# Altium PCB Radar_1GHz.PcbDoc (part 1 of 2)
Units mil, origin at the board's own origin, x right, y up, seen from the top; angles counter-clockwise.
Board outline 4921.26 x 3149.61 mil, 4 copper layers (Top Layer - RF, Layer 1 - GND, Layer 2 - GND, Bottom Layer - PWR), stack 62.633 mil thick; 158 components, 76 nets, 413 pads, 246 vias.
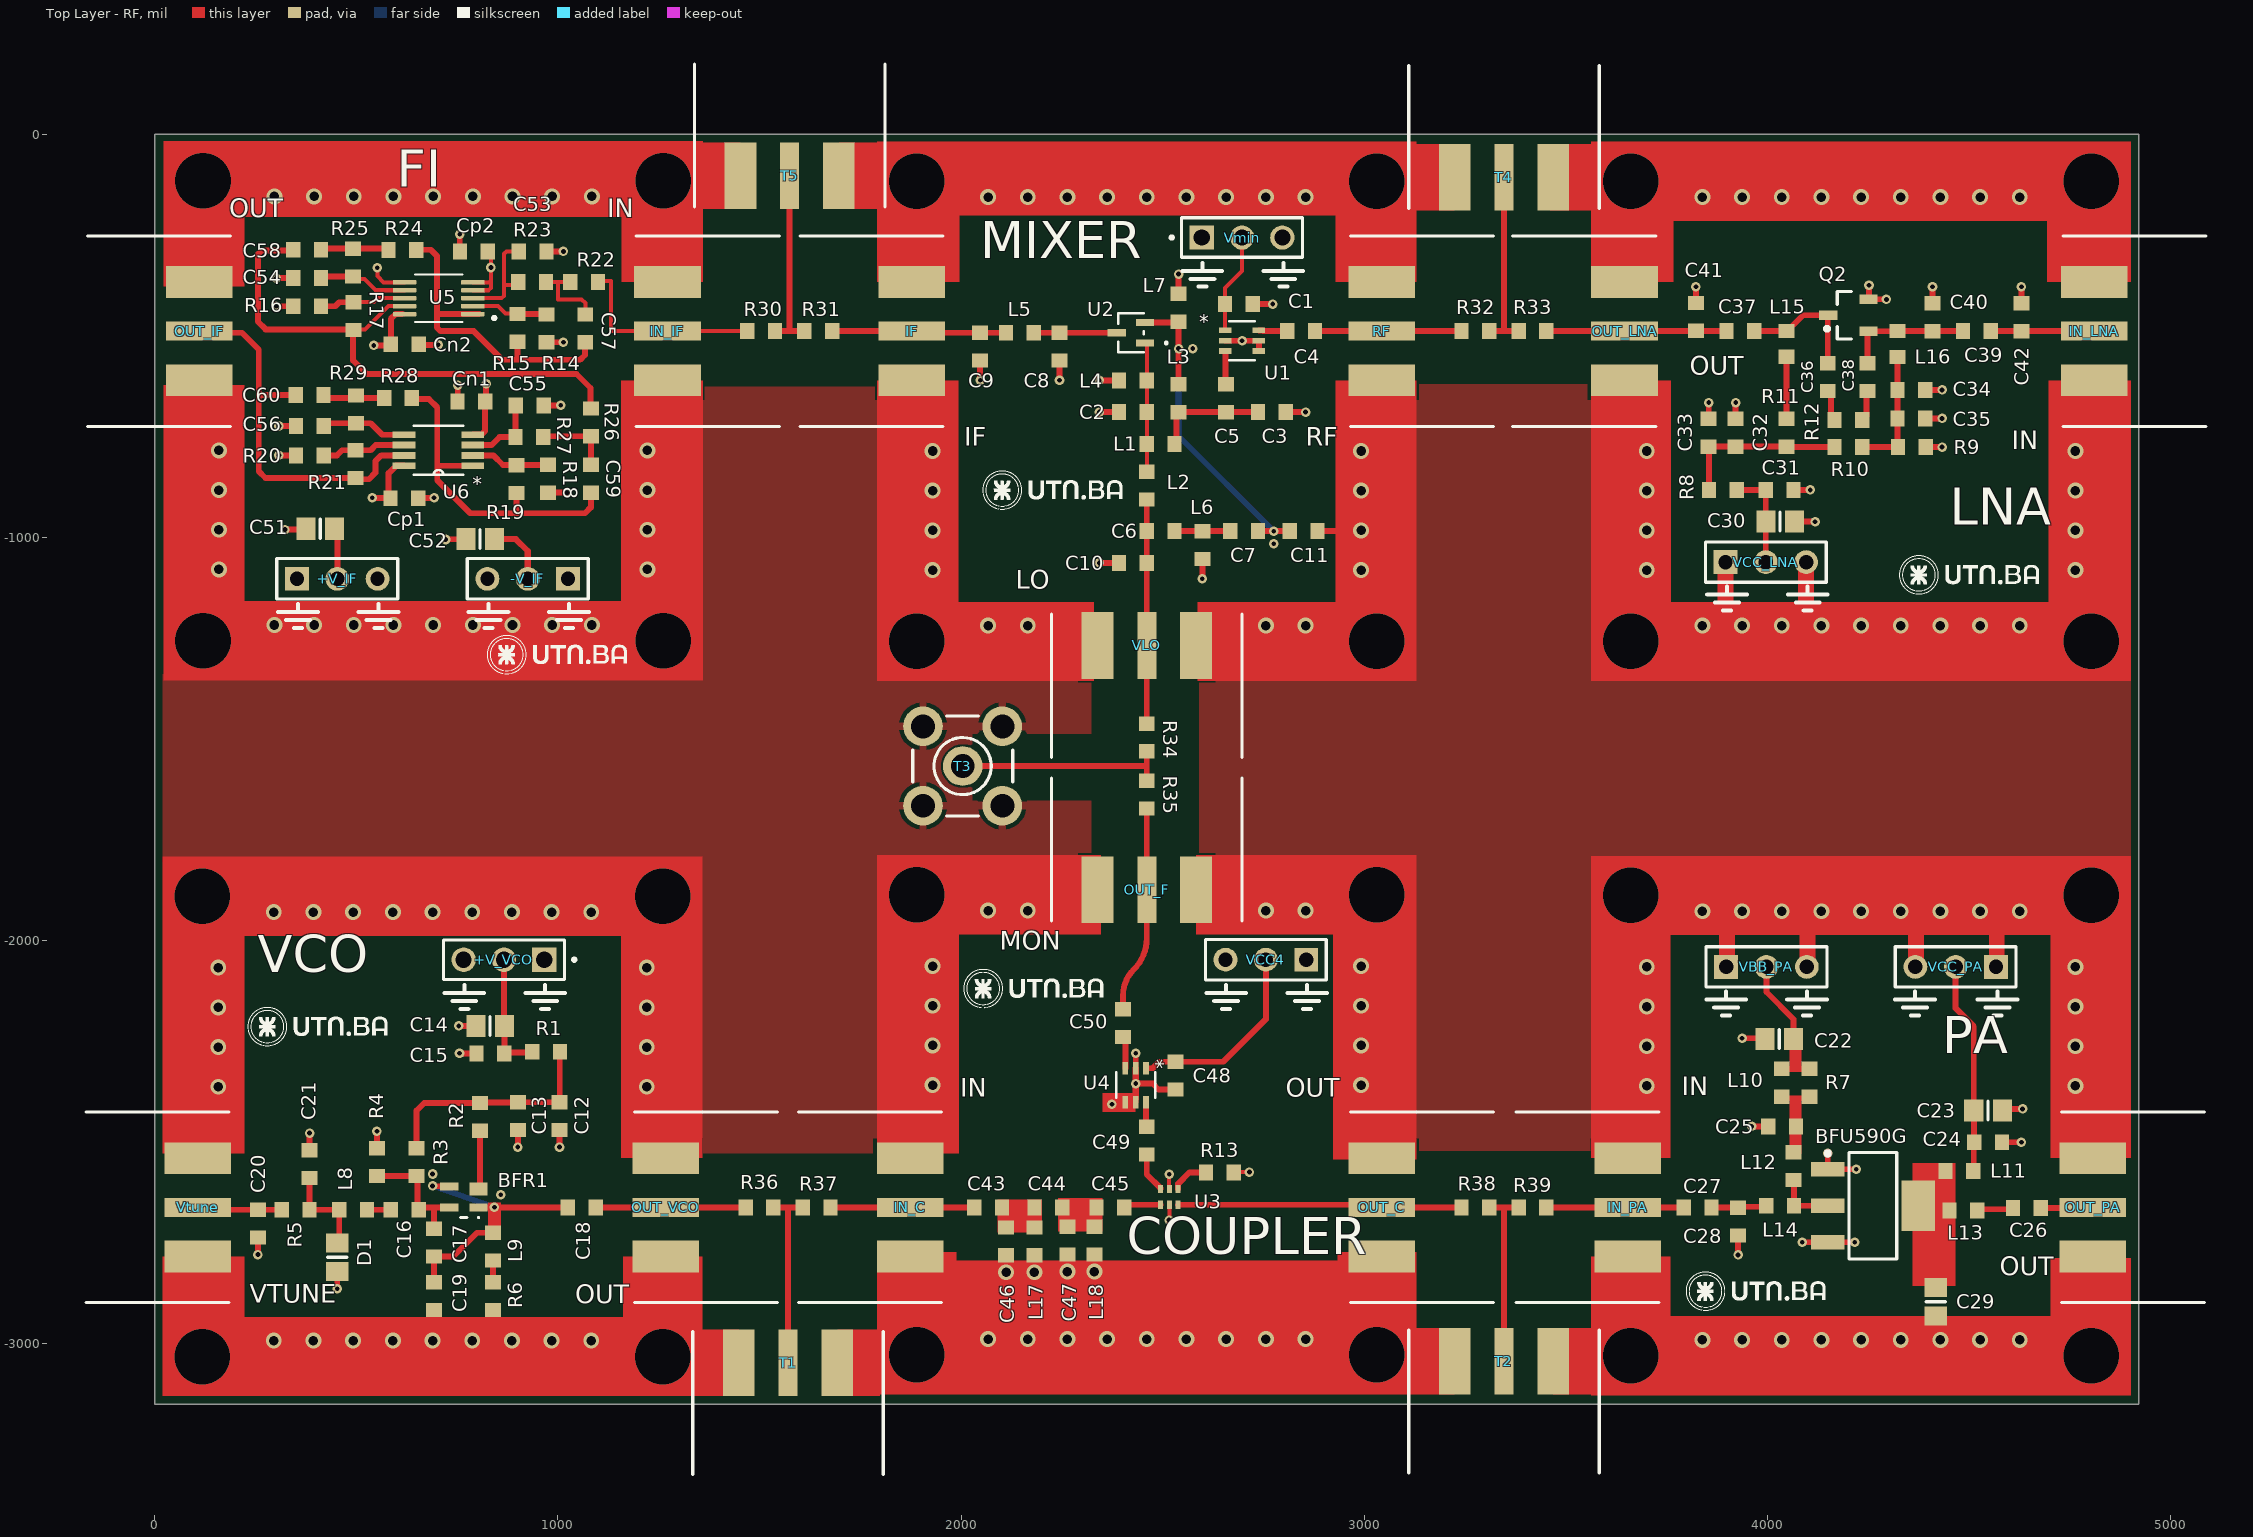
[diagram p0: Top Layer - RF view]
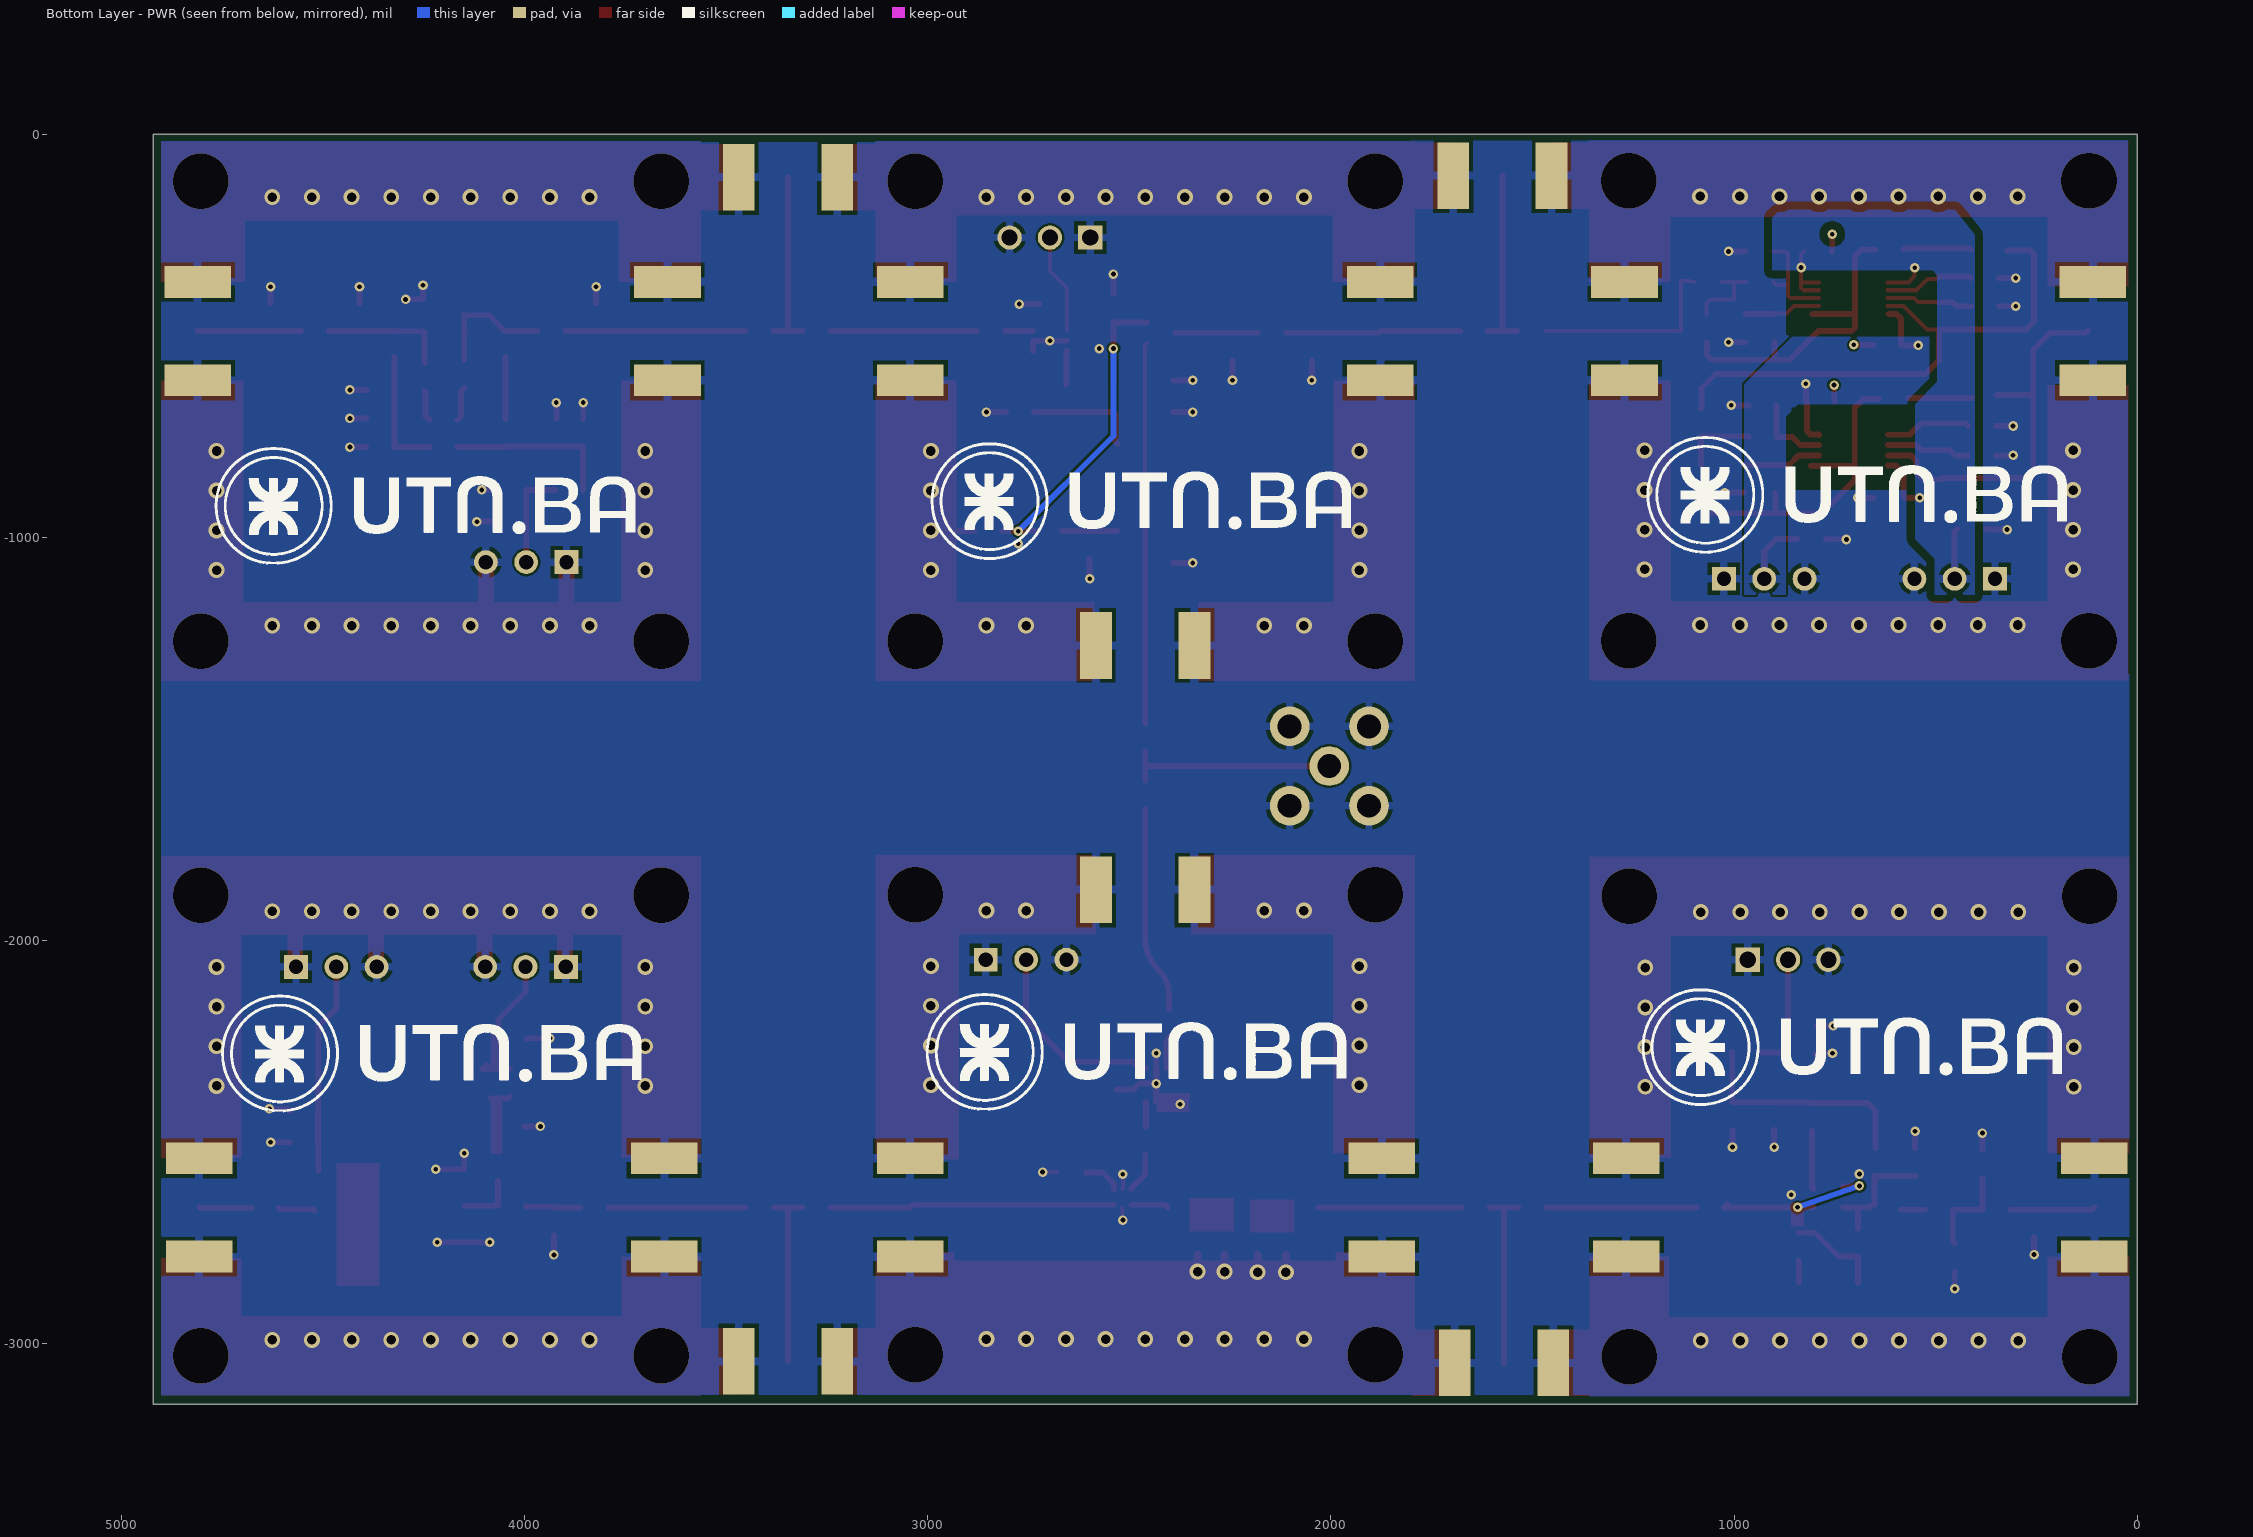
[diagram p1: Bottom Layer - PWR view, seen from below]
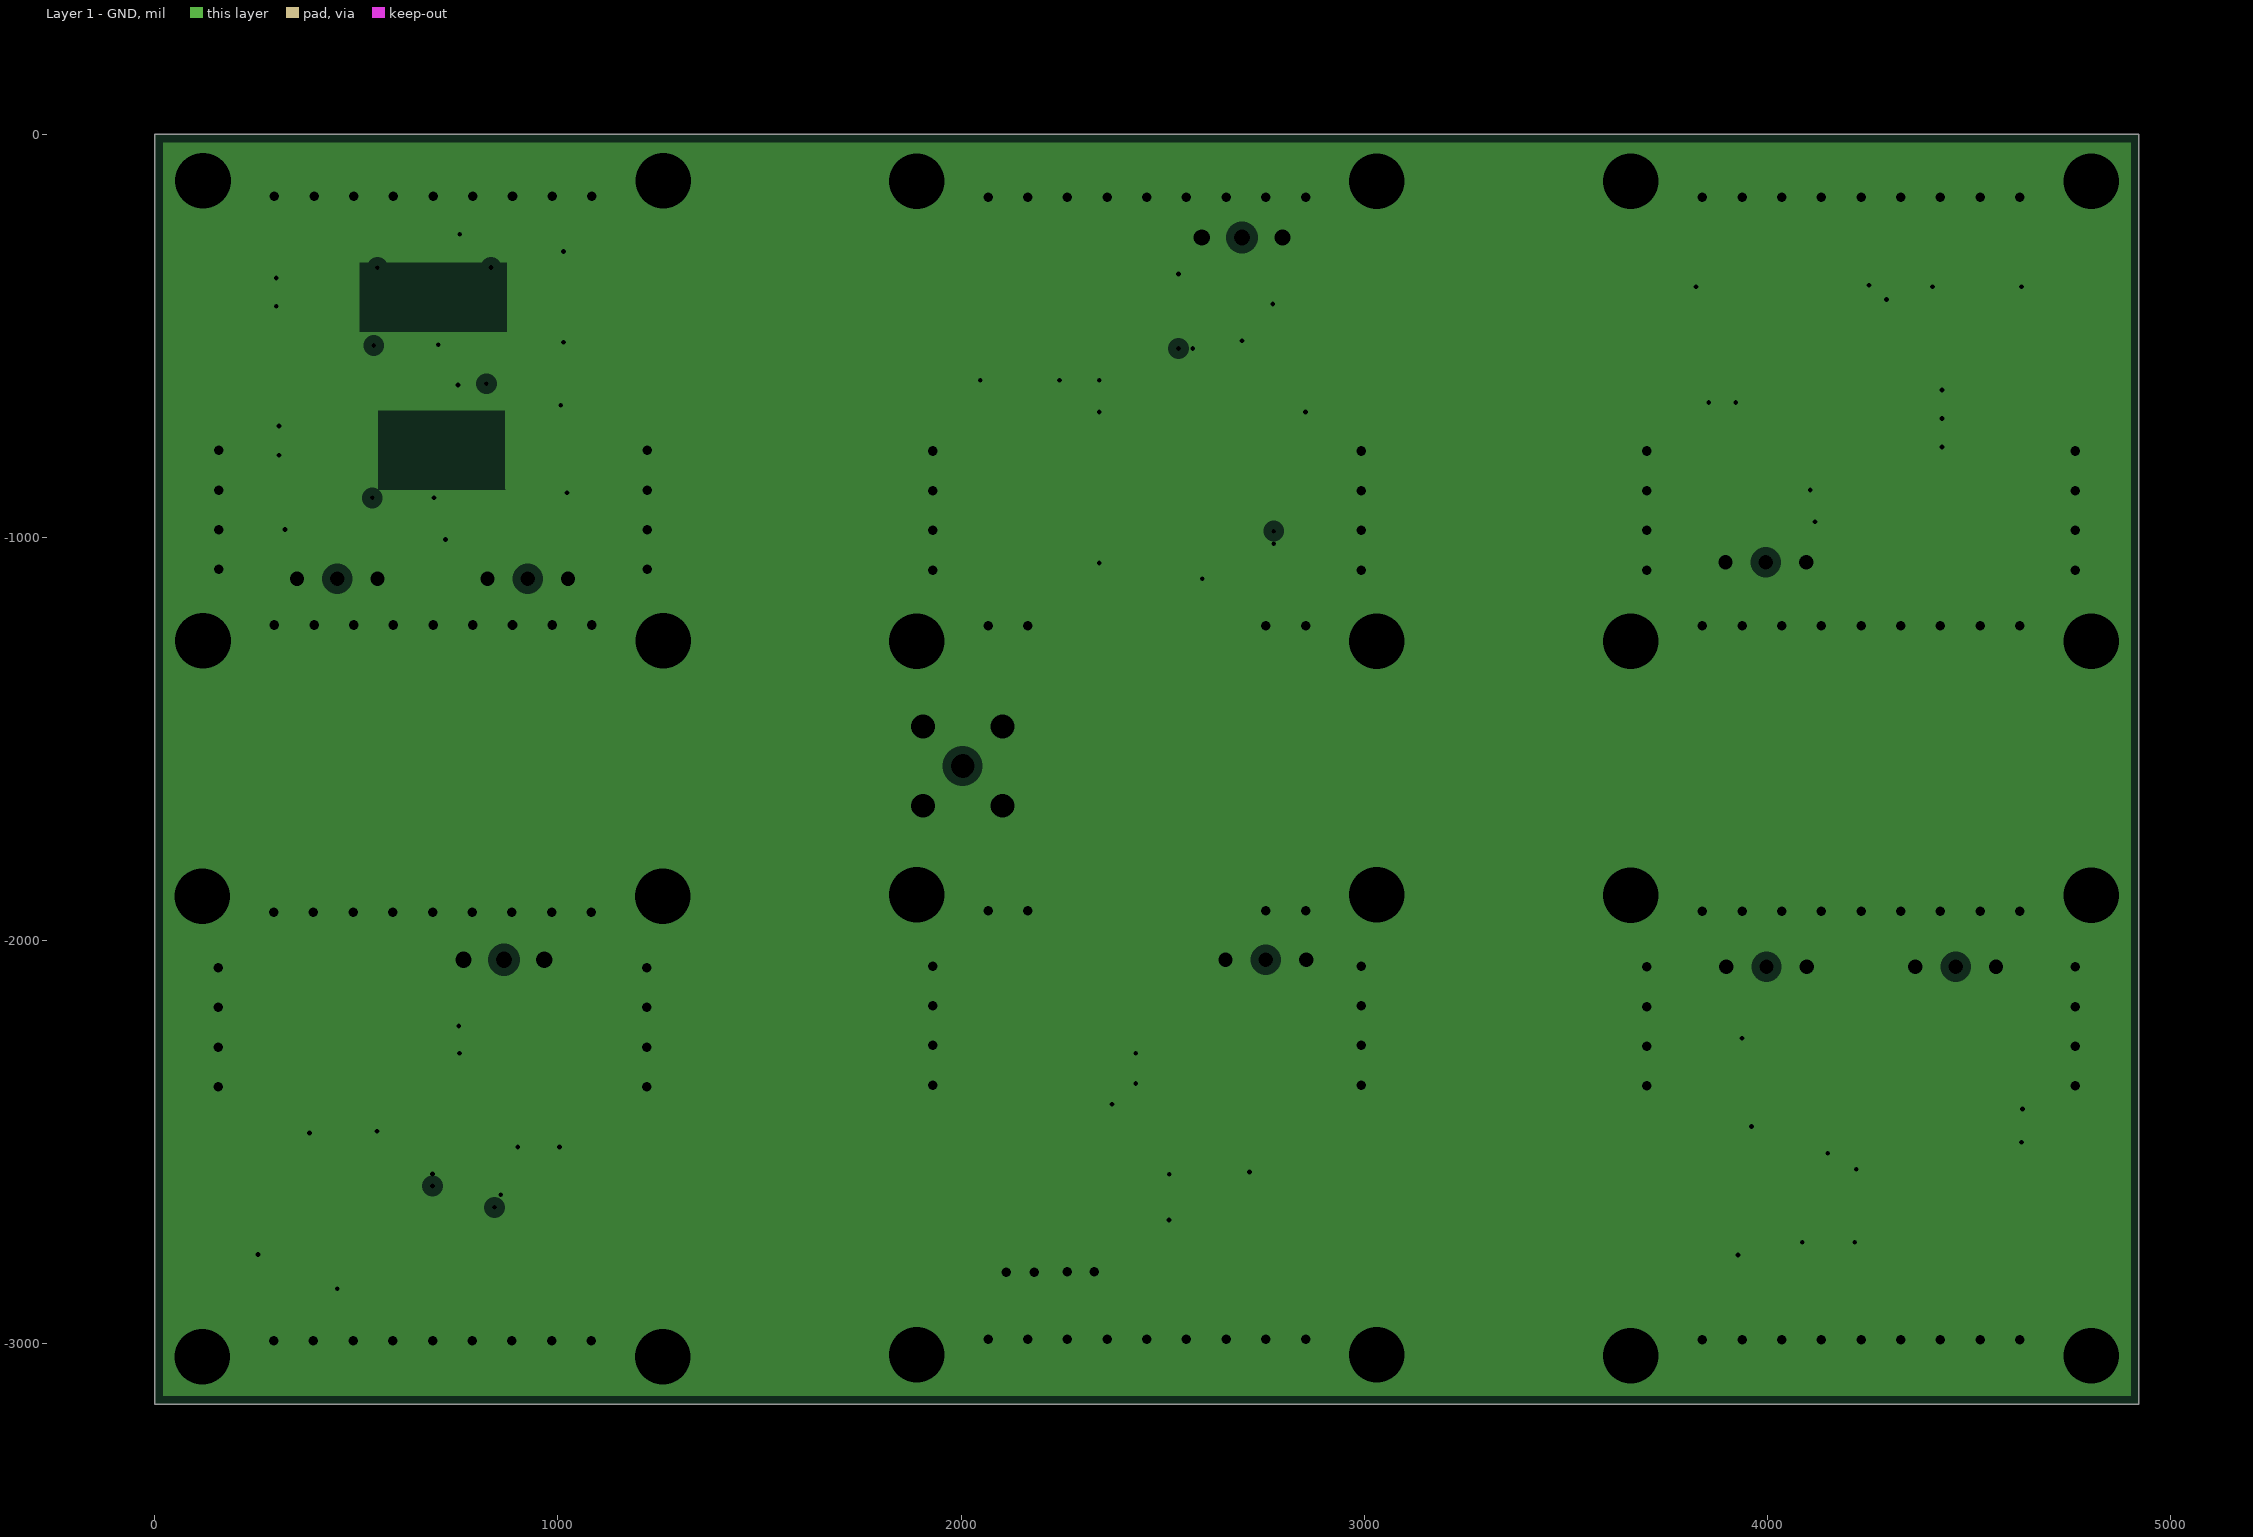
[diagram p2: Layer 1 - GND, clearances drawn from the general rule]
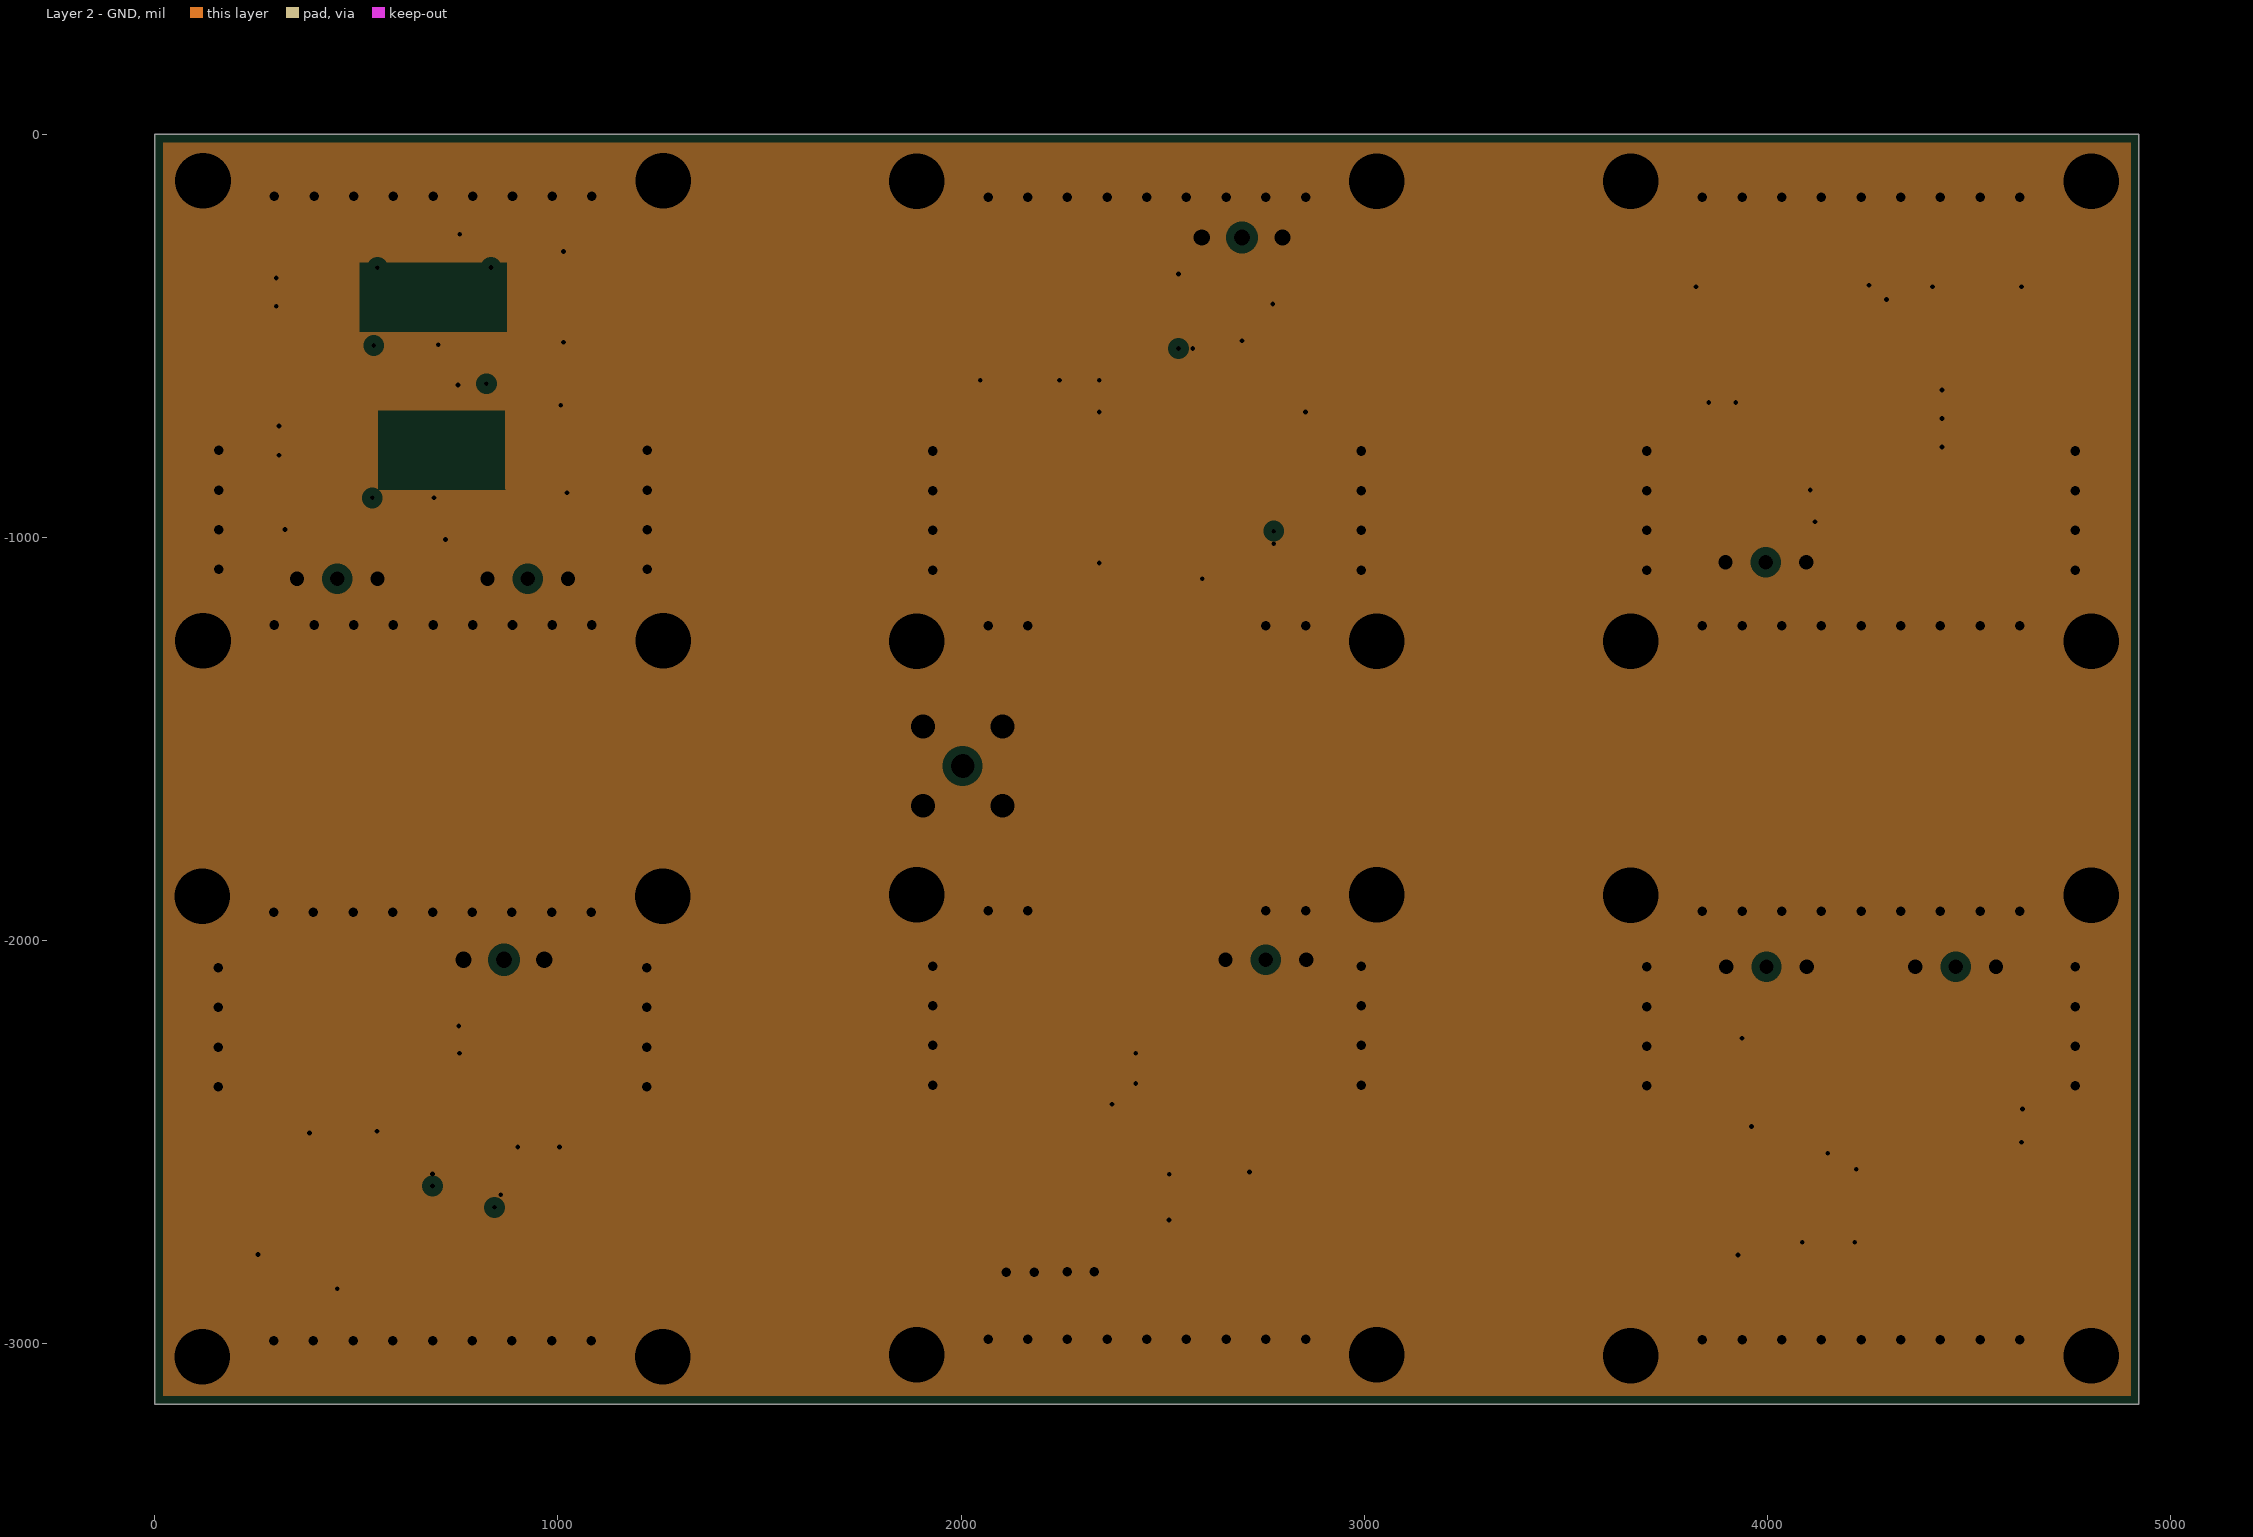
[diagram p3: Layer 2 - GND, clearances drawn from the general rule]

## Layer stack, top to bottom
Top Solder: solder mask 1, SM-001, Dk 4
Top Layer - RF: signal copper 1.378
Prepeg 1: prepreg 8.285, PP-006, Dk 4.4
Layer 1 - GND: plane copper 0.689, net GND
Dielectric 1: core 41.929, FR4, Dk 4.6
Layer 2 - GND: plane copper 0.689, net GND
Prepeg 2: prepreg 8.285, PP-006, Dk 4.4
Bottom Layer - PWR: signal copper 1.378
Bottom Solder: solder mask 1, SM-001, Dk 4

## Board outline
0,-3149.61 4921.26,-3149.61 4921.26,0 0,0

## Design rules (kind name [scope] priority, off if disabled: settings)
Clearance poly_top [InNamedPolygon('V+_sallen')] p1: gap=19.68 ignorepadtopadclearanceinfootprint=FALSE except(0: Arc-Hole Track-Hole SMDPad-Hole THPad-Hole Via-Hole Fill-Hole Poly-Hole Region-Hole Text-Hole)
Clearance poly_fi [InNamedPolygon('GND_L02_P006')] p2: gap=19.68 ignorepadtopadclearanceinfootprint=FALSE except(0: Arc-Hole Track-Hole SMDPad-Hole THPad-Hole Via-Hole Fill-Hole Poly-Hole Region-Hole Text-Hole)
Clearance poly_dc [InNamedPolygon('GND_L02_P005')] p3: gap=19.68 ignorepadtopadclearanceinfootprint=FALSE except(0: Arc-Hole Track-Hole SMDPad-Hole THPad-Hole Via-Hole Fill-Hole Poly-Hole Region-Hole Text-Hole)
Clearance poly_lna [InNamedPolygon('GND_L02_P004')] p4: gap=19.68 ignorepadtopadclearanceinfootprint=FALSE except(0: Arc-Hole Track-Hole SMDPad-Hole THPad-Hole Via-Hole Fill-Hole Poly-Hole Region-Hole Text-Hole)
Clearance poly_pa [InNamedPolygon('GND_L02_P003')] p5: gap=19.68 ignorepadtopadclearanceinfootprint=FALSE except(0: Arc-Hole Track-Hole SMDPad-Hole THPad-Hole Via-Hole Fill-Hole Poly-Hole Region-Hole Text-Hole)
Clearance poly_vco [InNamedPolygon('GND_L02_P001')] p6: gap=19.68 ignorepadtopadclearanceinfootprint=FALSE except(0: Arc-Hole Track-Hole SMDPad-Hole THPad-Hole Via-Hole Fill-Hole Poly-Hole Region-Hole Text-Hole)
Clearance poly_0 [InNamedPolygon('GND_L02_P000')] p7: gap=19.68 ignorepadtopadclearanceinfootprint=FALSE except(0: Arc-Hole Track-Hole SMDPad-Hole THPad-Hole Via-Hole Fill-Hole Poly-Hole Region-Hole Text-Hole)
Clearance [All] p8: gap=5 ignorepadtopadclearanceinfootprint=FALSE except(0: Arc-Hole Track-Hole SMDPad-Hole THPad-Hole Via-Hole Fill-Hole Poly-Hole Region-Hole Text-Hole)
ComponentClearance [All] p1: gap=0.39 collisioncheckmode=3 verticalgap=100000 showdistances=TRUE donotcheckwithout3dbody=TRUE
HoleSize [All] p1: absolutevalues=TRUE maxlimit=196.85 minlimit=1 maxpercent=80.000 minpercent=20.000
MinimumSolderMaskSliver [All] p1: minsoldermaskwidth=0.39
PlaneClearance plane_clearance_vias [IsVia] p1: clearance=6
PlaneClearance [All] p2: clearance=20
PlaneConnect PlaneConnect_vias [IsVia] p1: planeconnectstyle=Direct reliefexpansion=20 reliefentries=4 reliefconductorwidth=10 reliefairgap=10
PlaneConnect [All] p2: planeconnectstyle=Relief reliefexpansion=20 reliefentries=4 reliefconductorwidth=10 reliefairgap=10
PolygonConnect PolygonConnect_via [IsVia vs IsPolygon] p1: connectstyle=Direct reliefconductorwidth=10 reliefentries=4 polygonreliefangle="90 Angle" airgapwidth=10
PolygonConnect [All] p2: connectstyle=Relief reliefconductorwidth=19.68 reliefentries=4 polygonreliefangle="90 Angle" airgapwidth=10
RoomDefinition LOW_NOISE_AMPLIFIER [InComponentClass('LOW_NOISE_AMPLIFIER')] p1: confinementstyle=ConfineIn formatcopy=TRUE lockcomponents=FALSE outline 3334.65,-1586.61 5122.05,-1586.61 5122.05,173.23 3334.65,173.23
RoomDefinition DIRECTIONAL_COUPLER [InComponentClass('DIRECTIONAL_COUPLER')] p2: confinementstyle=ConfineIn formatcopy=TRUE lockcomponents=FALSE outline 1586.61,-3307.09 3350.39,-3307.09 3350.39,-1574.8 1586.61,-1574.8
RoomDefinition AMPLIFIER_IF [InComponentClass('AMPLIFIER_IF')] p3: confinementstyle=ConfineIn formatcopy=TRUE lockcomponents=FALSE outline -287.4,-1622.05 1586.61,-1622.05 1586.61,366.14 -287.4,366.14
RoomDefinition VCO [InComponentClass('VCO')] p4: confinementstyle=ConfineIn formatcopy=TRUE lockcomponents=FALSE outline -283.46,-3326.77 1551.18,-3326.77 1551.18,-1566.93 -283.46,-1566.93
RoomDefinition POWER_AMPLIFIER [InComponentClass('POWER_AMPLIFIER')] p5: confinementstyle=ConfineIn formatcopy=TRUE lockcomponents=FALSE outline 3350.39,-3362.2 5275.59,-3362.2 5275.59,-1547.24 3350.39,-1547.24
RoomDefinition MIXER [InComponentClass('MIXER')] p6: confinementstyle=ConfineIn formatcopy=TRUE lockcomponents=FALSE outline 1531.5,-1622.05 3366.14,-1622.05 3366.14,330.71 1531.5,330.71
RoomDefinition Completo [InComponentClass('Completo')] p7: confinementstyle=ConfineIn formatcopy=TRUE lockcomponents=FALSE outline -1850.39,-3807.09 5015.75,-3807.09 5015.75,870.08 -1850.39,870.08
RoutingVias [All] p1: holewidth=11.81 width=11.81 viastyle="Through Hole" minholewidth=7.87 minwidth=15.75 maxholewidth=11.81 maxwidth=11.81
SilkToSilkClearance [All] p1: silktosilkclearance=3.94
SilkToSolderMaskClearance [IsPad] p1: minsilkscreentomaskgap=6 clearancetoexposedcopper=TRUE
SolderMaskExpansion [All] p1: expansion=4 istentingtop=FALSE
Width GND_Width [InNet('GND')] p1: maxlimit=100 minlimit=0.01 preferedwidth=10 minimp=50.000000 maximp=50.000000 favimp=50.000000
Width RF50R [InNetClass('RF50R')] p2: maxlimit=14.5 minlimit=14.5 preferedwidth=14.5 impedanceprofiledriven=TRUE impedanceprofileid={3E6CA8BA-64D6-413C-9399-F518D5D78D00} impedanceprofilevalue=50.000000 minimp=50.000000 maximp=50.000000 favimp=50.000000
Width Width_1 [All] p3: maxlimit=20 minlimit=10 preferedwidth=10 minimp=50.000000 maximp=50.000000 favimp=50.000000
23 further rules are at their usual default settings.

## Classes and differential pairs
net class RF50R: B C GND Net+V_VCO_02 NetBFR1_1 NetBFU590G_2 NetBFU590G_4 NetC3_1 NetC4_1 NetC4_2 NetC5_1 NetC6_1 NetC6_2 NetC8_2 NetC9_2 NetC12_2 NetC16_2 NetC18_1 NetC20_2 NetC21_1 NetC22_1 NetC23_1 NetC25_2 NetC26_1 NetC26_2 NetC27_1 NetC27_2 NetC30_1 NetC32_1 NetC34_2 NetC36_1 NetC36_2 NetC37_2 NetC38_1 NetC38_2 NetC39_1 NetC43_1 NetC43_2 NetC44_2 NetC45_2 NetC48_2 NetC49_1 NetC49_2 NetC50_1 NetC50_2 NetL9_1 NetL15_2 NetOUT_C_1 NetR13_2 NetR30_2 NetR32_2 NetR34_1 NetR36_2 NetR38_2
component class Completo: R30 R31 R32 R33 R34 R35 R36 R37 R38 R39 T1 T2 T3 T4 T5
component class AMPLIFIER_IF: +V_IF -V_IF C51 C52 C53 C54 C55 C56 C57 C58 C59 C60 Cn1 Cn2 Cp1 Cp2 IN_IF OUT_IF R14 R15 R16 R17 R18 R19 R20 R21 R22 R23 R24 R25 R26 R27 R28 R29 U5 U6
component class DIRECTIONAL_COUPLER: C43 C44 C45 C46 C47 C48 C49 C50 IN_C L17 L18 OUT_C OUT_F R13 U3 U4 VCC4
component class LOW_NOISE_AMPLIFIER: C30 C31 C32 C33 C34 C35 C36 C37 C38 C39 C40 C41 C42 IN_LNA L15 L16 OUT_LNA Q2 R8 R9 R10 R11 R12 VCC_LNA
component class POWER_AMPLIFIER: BFU590G C22 C23 C24 C25 C26 C27 C28 C29 IN_PA L10 L11 L12 L13 L14 OUT_PA R7 VBB_PA VCC_PA
component class VCO: +V_VCO BFR1 C12 C13 C14 C15 C16 C17 C18 C19 C20 C21 D1 L8 L9 OUT_VCO R1 R2 R3 R4 R5 R6 Vtune
component class MIXER: C1 C2 C3 C4 C5 C6 C7 C8 C9 C10 C11 IF L1 L2 L3 L4 L5 L6 L7 RF U1 U2 VLO Vmin

## Components (designator, comment, footprint, x,y, rotation, side; value= is the part's Value field where it differs from the comment)
+V_IF "Header 3" HDR1X3 352.76,-1102.36 r0 top
+V_VCO "HTSW-103-XX-X-S" SAMTEC_HTSW-103-XX-X-S 866.14,-2047.24 r0 top
-V_IF "Header 3" HDR1X3 1025.2,-1102.36 r180 top
BFR1 "BFP420" SOT-343_N 766.73,-2635.83 r180 top
BFU590G "NPN" SOT223_L 4261.81,-2657.48 r0 top
C1 "Cap 0603" CAPC1608X90N 2689.3,-420.94 r180 top value=100pF
C2 "Cap 0603" CAPC1608X90N 2426.18,-688.98 r180 top value=5.6pF
C3 "Cap 0603" CAPC1608X90N 2770.67,-688.98 r0 top value=5.6pF
C4 "Cap 0603" CAPC1608X90N 2843.5,-488.19 r180 top value=1006pF
C5 "Cap 0603" CAPC1608X90N 2657.48,-654.53 r270 top value=100pF
C6 "Cap 0603" CAPC1608X90N 2495.08,-984.25 r0 top value=2.2pF
C7 "Cap 0603" CAPC1608X90N 2701.77,-984.25 r0 top value=2.2pF
C8 "Cap 0603" CAPC1608X90N 2244.09,-526.57 r90 top value=100pF
C9 "Cap 0603" CAPC1608X90N 2047.24,-526.57 r90 top value=100pF
C10 "Cap 0603" CAPC1608X90N 2426.18,-1062.99 r0 top value=2.2pF
C11 "Cap 0603" CAPC1608X90N 2849.41,-984.25 r180 top value=2.2pF
C12 "Cap 0603" CAPC1608X90N 1003.94,-2435.04 r90 top value=0.6pF
C13 "Cap 0603" CAPC1608X90N 900.59,-2435.04 r90 top value=0.6pF
C14 "1uF" 6-0805_N 831.69,-2211.61 r180 top
C15 "Cap 0603" CAPC1608X90N 832.68,-2279.53 r0 top value=0.6pF
C16 "Cap 0603" CAPC1608X90N 620.08,-2667.32 r180 top value=0.6pF
C17 "Cap 0603" CAPC1608X90N 692.91,-2749.02 r90 top value=0.6pF
C18 "Cap 0603" CAPC1608X90N 1059.06,-2661.42 r180 top value=0.6pF
C19 "Cap 0603" CAPC1608X90N 692.91,-2881.89 r90 top value=0.6pF
C20 "Cap 0603" CAPC1608X90N 255.91,-2701.77 r90 top value=0.6pF
C21 "Cap 0603" CAPC1608X90N 383.86,-2554.13 r90 top value=0.6pF
C22 "10uF" 6-0805_N 4029.53,-2244.09 r180 top
C23 "22nF" 6-0805_N 4547.24,-2421.26 r0 top
C24 "Cap 0603" CAPC1608X90N 4547.24,-2500 r0 top value=100pF
C25 "Cap 0603" CAPC1608X90N 4036.42,-2460.63 r0 top value=100pF
C26 "Cap 0603" CAPC1608X90N 4643.7,-2663.39 r0 top value=100pF
C27 "Cap 0603" CAPC1608X90N 3826.77,-2661.42 r0 top value=100pF
C28 "Cap 0603" CAPC1608X90N 3927.17,-2696.85 r90 top value=3.3pF
C29 "no mounted" 6-0805_N 4417.32,-2895.67 r270 top value=100pF
C30 "1uF" 6-0805_N 4031.5,-960.63 r0 top
C31 "Cap 0603" CAPC1608X90N 4030.51,-881.89 r0 top value=0.6pF
C32 "Cap 0603" CAPC1608X90N 3921.26,-740.16 r90 top value=0.6pF
C33 "Cap 0603" CAPC1608X90N 3854.33,-740.16 r90 top value=0.6pF
C34 "Cap 0603" CAPC1608X90N 4357.28,-633.86 r180 top value=0.6pF
C35 "Cap 0603" CAPC1608X90N 4357.28,-704.72 r180 top value=0.6pF
C36 "Cap 0603" CAPC1608X90N 4149.61,-602.36 r270 top value=0.6pF
C37 "Cap 0603" CAPC1608X90N 3933.07,-488.19 r180 top value=0.6pF
C38 "Cap 0603" CAPC1608X90N 4248.03,-602.36 r270 top value=0.6pF
C39 "Cap 0603" CAPC1608X90N 4519.69,-488.19 r180 top value=0.6pF
C40 "Cap 0603" CAPC1608X90N 4409.45,-453.74 r270 top value=0.6pF
C41 "Cap 0603" CAPC1608X90N 3822.83,-452.76 r270 top value=0.6pF
C42 "Cap 0603" CAPC1608X90N 4629.92,-453.74 r270 top value=0.6pF
C43 "Cap 0603" CAPC1608X90N 2066.93,-2661.42 r0 top value=3pF
C44 "Cap 0603" CAPC1608X90N 2216.54,-2661.42 r0 top value=1.5pF
C45 "Cap 0603" CAPC1608X90N 2370.08,-2661.42 r0 top value=3pF
C46 "Cap 0603" CAPC1608X90N 2111.65,-2745.67 r90 top value=0.6pF
C47 "Cap 0603" CAPC1608X90N 2263.78,-2744.09 r90 top value=2pF
C48 "Cap 0603" CAPC1608X90N 2531.5,-2334.65 r90 top value=0.6pF
C49 "Cap 0603" CAPC1608X90N 2460.63,-2496.06 r90 top value=0.6pF
C50 "Cap 0603" CAPC1608X90N 2401.57,-2204.72 r90 top value=0.6pF
C51 "1uF" 6-0805_N 410.43,-978.35 r180 top
C52 "1uF" 6-0805_N 807.09,-1003.94 r180 top
C53 "Cap 0603" CAPC1608X90N 937.01,-290.35 r180 top value=1nF
C54 "Cap 0603" CAPC1608X90N 377.91,-356.38 r0 top value=1nF
C55 "Cap 0603" CAPC1608X90N 930.12,-672.24 r180 top value=1nF
C56 "Cap 0603" CAPC1608X90N 384.84,-723.43 r0 top value=1nF
C57 "Cap 0603" CAPC1608X90N 1067.91,-481.3 r90 top value=180pF
C58 "Cap 0603" CAPC1608X90N 377.91,-286.38 r0 top value=200pF
C59 "Cap 0603" CAPC1608X90N 1081.69,-854.33 r90 top value=220pF
C60 "Cap 0603" CAPC1608X90N 383.86,-646.65 r0 top value=220pF
Cn1 "Cap 0603" CAPC1608X90N 785.43,-662.4 r0 top value=100nF
Cn2 "Cap 0603" CAPC1608X90N 620.08,-520.67 r180 top value=100nF
Cp1 "Cap 0603" CAPC1608X90N 619.09,-902.56 r180 top value=100nF
Cp2 "Cap 0603" CAPC1608X90N 791.34,-290.35 r0 top value=100nF
D1 "SMV1232" 6-0805_N 452.76,-2785.43 r90 top
IF "SMA" SMA-142-0701-851 1877.95,-488.19 r270 top
IN_C "SMA" SMA-142-0701-851 1874.02,-2661.42 r270 top
IN_IF "SMA" SMA-142-0701-851 1271.65,-488.19 r90 top
IN_LNA "SMA" SMA-142-0701-851 4811.02,-488.19 r90 top
IN_PA "SMA" SMA-142-0701-851 3653.54,-2661.42 r270 top
L1 "LQW18" INDC1608X100N#1 2495.08,-767.72 r0 top value=11nHy
L2 "LQW18" INDC1608X100N#1 2460.63,-871.06 r90 top value=11nHy
L3 "LQW18" INDC1608X100N#1 2539.37,-654.53 r270 top value=11nHy
L4 "LQW18" INDC1608X100N#1 2426.18,-610.24 r180 top value=200nHy
L5 "LQW18" INDC1608X100N#1 2145.67,-492.13 r180 top value=120nHy
L6 "LQW18" INDC1608X100N#1 2598.43,-1018.7 r90 top value=11nHy
L7 "LQW18" INDC1608X100N#1 2539.37,-430.12 r270 top value=200nHy
L8 "LQW18" INDC1608X100N#1 492.13,-2667.32 r0 top value=1nHy
L9 "LQW18" INDC1608X100N#1 838.58,-2758.86 r90 top value=1nHy
L10 "LQW18" INDC1608X100N#1 4035.43,-2352.36 r90 top value=470nHy
L11 "LQW18" INDC1608X100N#1 4476.38,-2570.87 r0 top value=18nHy
L12 "LQW18" INDC1608X100N#1 4064.96,-2559.06 r90 top value=470nHy
L13 "LQW18" INDC1608X100N#1 4486.22,-2669.29 r0 top value=6.8nHy
L14 "LQW18" INDC1608X100N#1 4031.5,-2657.48 r0 top value=15nHy
L15 "LQW18" INDC1608X100N#2 4047.24,-519.69 r270 top
L16 "LQW18" INDC1608X100N#2 4322.83,-520.24 r270 top
L17 "LQW18" INDC1608X100N#1 2181.65,-2745.67 r90 top value=5.6nHy
L18 "LQW18" INDC1608X100N#1 2330.71,-2744.09 r90 top value=5.6nHy
OUT_C "SMA" SMA-142-0701-851 3043.31,-2661.42 r90 top
OUT_F "SMA" SMA-142-0701-851 2460.63,-1874.02 r180 top locked
OUT_IF "SMA" SMA-142-0701-851 110.24,-488.19 r270 top
OUT_LNA "SMA" SMA-142-0701-851 3645.67,-488.19 r270 top
OUT_PA "SMA" SMA-142-0701-851 4807.09,-2661.42 r90 top
OUT_VCO "SMA" SMA-142-0701-851 1267.72,-2661.42 r90 top
Q2 "NPN" SOT23_N_bfu550a 4200.79,-448.82 r180 top
R1 "Resistor" RESC1508X55N 970.47,-2275.59 r0 top value="10 ohms"
R2 "Resistor" RESC1508X55N 807.09,-2437.01 r90 top value="10 ohms"
R3 "Resistor" RESC1508X55N 649.61,-2549.21 r90 top value="10 ohms"
R4 "Resistor" RESC1508X55N 551.18,-2549.21 r270 top value="10 ohms"
R5 "Resistor" RESC1508X55N 349.41,-2667.32 r180 top value="10 ohms"
R6 "Resistor" RESC1508X55N 838.58,-2881.89 r90 top value="10 ohms"
R7 "Resistor" RESC1508X55N 4104.33,-2352.36 r90 top value="10 ohms"
R8 "Resistor" RESC1508X55N 3889.76,-881.89 r0 top value="10 ohms"
R9 "Resistor" RESC1508X55N 4358.27,-775.59 r0 top value="10 ohms"
R10 "Resistor" RESC1508X55N 4200.79,-775.59 r180 top value="10 ohms"
R11 "Resistor" RESC1508X55N 4047.24,-740.16 r270 top value="10 ohms"
R12 "Resistor" RESC1508X55N 4200.79,-708.66 r180 top value="10 ohms"
R13 "Resistor" RESC1508X55N 2641.73,-2574.8 r180 top value="10 ohms"
R14 "Resistor" RESC1508X55N 971.46,-481.3 r90 top value="2.4 kohms"
R15 "Resistor" RESC1508X55N 899.61,-480.31 r270 top value="11 kohms"
R16 "Resistor" RESC1508X55N 377.91,-426.38 r0 top value="2.4 kohms"
R17 "Resistor" RESC1508X55N 493.11,-450.79 r270 top value="11 kohms"
R18 "Resistor" RESC1508X55N 975.39,-854.33 r90 top value="2.4 kohms"
R19 "Resistor" RESC1508X55N 897.64,-855.31 r270 top value="11 kohms"
R20 "Resistor" RESC1508X55N 384.84,-796.26 r0 top value="2.4 kohms"
R21 "Resistor" RESC1508X55N 498.03,-817.91 r270 top value="11 kohms"
R22 "Resistor" RESC1508X55N 1064.96,-366.14 r180 top value="75 kohms"
R23 "Resistor" RESC1508X55N 936.02,-366.14 r180 top value="18 kohms"
R24 "Resistor" RESC1508X55N 614.17,-286.42 r180 top value="56 kohms"
R25 "Resistor" RESC1508X55N 492.13,-317.91 r270 top value="22 kohms"
R26 "Resistor" RESC1508X55N 1081.69,-714.57 r270 top value="62 kohms"
R27 "Resistor" RESC1508X55N 929.13,-750.98 r180 top value="18 kohms"
R28 "Resistor" RESC1508X55N 603.35,-653.54 r180 top value="130 kohms"
R29 "Resistor" RESC1508X55N 499.02,-682.09 r270 top value="8.2 kohms"
R30 "Resistor" RESC1508X55N 1503.94,-488.19 r0 top value="10 ohms"
R31 "Resistor" RESC1508X55N 1645.67,-488.19 r0 top value="10 ohms"
R32 "Resistor" RESC1508X55N 3275.59,-488.19 r0 top value="10 ohms"
R33 "Resistor" RESC1508X55N 3417.32,-488.19 r0 top value="10 ohms"
R34 "Resistor" RESC1508X55N 2460.63,-1496.06 r90 top value="10 ohms"
R35 "Resistor" RESC1508X55N 2460.63,-1637.8 r90 top value="10 ohms"
R36 "Resistor" RESC1508X55N 1500,-2661.42 r0 top value="10 ohms"
R37 "Resistor" RESC1508X55N 1641.73,-2661.42 r0 top value="10 ohms"
R38 "Resistor" RESC1508X55N 3275.59,-2661.42 r0 top value="10 ohms"
R39 "Resistor" RESC1508X55N 3417.32,-2661.42 r0 top value="10 ohms"
RF "SMA" SMA-142-0701-851 3043.31,-488.19 r90 top
T1 "SMA" SMA-142-0701-851 1570.87,-3047.24 r0 top
T2 "SMA" SMA-142-0701-851 3346.46,-3043.31 r0 top
T3 "SMB" SMB_V-RJ45 2003.94,-1566.93 r270 top
T4 "SMA" SMA-142-0701-851 3346.46,-106.3 r180 top
T5 "SMA" SMA-142-0701-851 1574.8,-102.36 r180 top
U1 "BGA2866,115" SOT363_NXP 2696.85,-511.81 r0 top
U2 "BAT1504W" SOT_327XTSA1_INF 2421.26,-492.13 r90 top
U3 "HHM2215SA5" HHM-6_1P6X0P8 2516.65,-2635.35 r90 top
U4 "BGA2866,115" SOT363_NXP 2433.07,-2358.27 r270 top
U5 "LMP7712MMNOPB" SOP50P490X110-10N 704.33,-406.38 r180 top
U6 "OPA2322AIDGKR_1" DGK8 703.74,-783.46 r180 top
VBB_PA "Header 3" HDR1X3 3897.64,-2064.96 r0 top
VCC4 "Header 3" HDR1X3 2855.91,-2047.24 r180 top
VCC_LNA "Header 3" HDR1X3 3896.06,-1061.02 r0 top
VCC_PA "Header 3" HDR1X3 4566.93,-2064.96 r180 top
VLO "SMA" SMA-142-0701-851 2460.63,-1267.72 r0 top
Vmin "HTSW-103-XX-X-S" SAMTEC_HTSW-103-XX-X-S 2696.85,-255.91 r180 top
Vtune "SMA" SMA-142-0701-851 106.3,-2661.42 r270 top

## Footprints (in the part's own frame and the unit in brackets; to place one, negate y for a bottom-side part, rotate by r counter-clockwise, add the part's x,y. Pads: shape width x height; smd on the part's side, far side on the other; paste and mask are expansions set on the pad)
6-0805_N [mm] "Chip Resistor, Body 2.0x1.2mm, IPC Medium Density"
  rect 1.2x1.4 smd: 1(-0.9,0) 2(0.9,0)
  silkscreen extent 0,-0.6 0,0.6, body extent -1.07,-0.7 1.07,0.7, height 0.7
CAPC1608X90N [mm]
  rect 0.9x1 smd: 1(-0.875,0) 2(0.875,0)
  body extent -0.8,-0.41 0.8,0.41, height 0.89
DGK8 [mil]
  rect 56x17 smd paste-28 mask-28: 1(-85.5,38.39) 2(-85.5,12.8) 3(-85.5,-12.8) 4(-85.5,-38.39) 5(85.5,-38.39) 6(85.5,-12.8) 7(85.5,12.8) 8(85.5,38.39)
  silkscreen extent -61,-61 61,61, body extent -99,-61 99,61, height 43
HDR1X3 [mm] "Connector; Header; 3 Position"
  rect 1.5x1.5 hole 0.9: 1(0,0)
  round 1.5 hole 0.9: 2(2.54,0) 3(5.08,0)
  silkscreen extent -1.27,-1.27 6.35,1.27
HHM-6_1P6X0P8 [mil]
  rect 20x12 smd paste+0 mask+0: 1(-19.69,21.65) 2(-19.69,0) 3(-19.69,-21.65) 4(19.69,-21.65) 5(19.69,0) 6(19.69,21.65)
  body extent -19,-34 19,34, height 28
INDC1608X100N#1 [mm] "Inductor LQW0603"
  rect 0.9x1 smd: 1(-0.875,0) 2(0.875,0)
  body extent -0.8,-0.38 0.8,0.42, height 1
INDC1608X100N#2 [mm]
  rect 0.89x1.02 smd: 1(-0.814,0) 2(0.814,0)
  body extent -0.8,-0.38 0.8,0.42, height 1
RESC1508X55N [mm]
  rect 0.9x1 smd: 1(-0.875,0) 2(0.875,0)
  body extent -0.77,-0.4 0.78,0.4, height 0.55
SAMTEC_HTSW-103-XX-X-S [mm]
  rect 1.53x1.53 hole 1.02: 01(2.54,0)
  round 1.53 hole 1.02: 02(0,0) 03(-2.54,0)
  silkscreen extent -3.81,-1.24 4.53,1.24
SMA-142-0701-851 [mm] "SMA 50 Ohm, End Launch Jack Receptacle, Tab Contact"
  rect 1.2x4.2 smd: 1(0,0)
  rect 2x4.2 smd: 2(-3.1,0) 2(3.1,0)
  rect 2x4.2 smd far side: 2(-3.1,0) 2(3.1,0)
  silkscreen extent -6,-7.04 6,1.96
SMB_V-RJ45 [mm]
  round 2.5 hole 1.5: 1(0,0) 2(-2.5,2.5) 2(-2.5,-2.5) 2(2.5,2.5) 2(2.5,-2.5)
  silkscreen extent -3.15,-3.15 3.15,3.15
SOP50P490X110-10N [mm]
  rrect25% 1.47x0.28 smd: 1(-2.15,1) 2(-2.15,0.5) 3(-2.15,0) 4(-2.15,-0.5) 5(-2.15,-1) 6(2.15,-1) 7(2.15,-0.5) 8(2.15,0) 9(2.15,0.5) 10(2.15,1)
  silkscreen extent -3.6,-1.5 1.5,1.5, body extent -2.5,-1.5 2.4,1.5, height 1.1
SOT23_N_bfu550a [mm]
  rect 1.15x0.6 smd: 1(-1.27,1.016) 2(-1.27,-1.016) 3(1.27,0)
  silkscreen extent -0.2,-1.5 1.47,1.5, body extent -0.7,-1.5 0.7,1.5, height 1.1
SOT223_L [mm] "SOT223, 4-Leads, Body 6.5x3.5mm, Pitch 2.3mm, Lead Span 7mm, IPC High Density"
  rect 2.1x0.9 smd: 1(-2.85,2.3) 2(-2.85,0) 3(-2.85,-2.3)
  rect 2.1x3.2 smd: 4(2.85,0)
  silkscreen extent -2.97,-3.35 1.5,3.42, body extent -1.85,-3.35 1.85,3.35, height 1.7
SOT363_NXP [mil]
  rect 31x14 smd paste+0 mask+0: 1(-42,25.59) 2(-42,0) 3(-42,-25.59) 4(42,-25.59) 5(42,0) 6(42,25.59)
  silkscreen extent -32,-48 32,48, body extent -44,-44 44,44, height 43
SOT-343_N [mm] "SOT343, 4-Leads, Body 2x1.3 mm, Pitch 1.3mm, Lead Span 2.1mm, IPC Medium Density"
  rect 1.15x0.5 smd: 1(-0.925,0.65) 3(0.925,-0.65) 4(0.925,0.65)
  rect 1.15x0.8 smd: 2(-0.925,-0.5)
  silkscreen extent -0.97,1.25 0.2,1.35, body extent -0.7,-1.1 0.7,1.1, height 1
SOT_327XTSA1_INF [mil]
  rect 18x45 smd paste+0 mask+0: 1(-25.59,-35) 2(25.59,-35) 3(0,35)
  silkscreen extent -48,-90 48,32, body extent -44,-44 44,44, height 39

## Part data
+V_IF -V_IF VBB_PA VCC4 VCC_LNA VCC_PA: "Header, 3-Pin", LatestRevisionDate=17-Jul-2002, LatestRevisionNote="Re-released for DXP Platform.", Publisher="Altium Limited"
+V_VCO Vmin: "Conn Unshrouded Header HDR 3 POS 2.54mm Solder ST Top Entry Thru-Hole Bag", Package=None, Availability="In Stock", Check_prices=https://www.snapeda.com/parts/HTSW-103-08-S-S/Samtec/view-part/?ref=eda, MF=Samtec, MP=HTSW-103-08-S-S, Price=None, Purchase-URL=https://pricing.snapeda.com/search/part/HTSW-103-08-S-S/?ref=eda, SnapEDA_Link=https://www.snapeda.com/parts/HTSW-103-08-S-S/Samtec/view-part/?ref=snap
BFR1: library part BFR460, "NPN Bipolar Transistor", Code_JEDEC=TO-226-AA, LatestRevisionDate=17-Jul-2002, LatestRevisionNote="Re-released for DXP Platform.", PackageDescription="TO, Flat Index; 3 In-Line, Axial Leads; Body Dia. 4.8mm; Leads 0.55 x 0.51 mm (max)", PackageReference=TO-226-AA, Published=8-Jun-2000, Publisher="Altium Limited"
BFU590G: library part BFU590G, "NPN Bipolar Transistor", Code_JEDEC=TO-226-AA, LatestRevisionDate=17-Jul-2002, LatestRevisionNote="Re-released for DXP Platform.", PackageDescription="TO, Flat Index; 3 In-Line, Axial Leads; Body Dia. 4.8mm; Leads 0.55 x 0.51 mm (max)", PackageReference=TO-226-AA, Published=8-Jun-2000, Publisher="Altium Limited"
C1 C2 C3 C4 C5 C6 C7 C8 C9 C10 C11 C12 C13 C15 C16 C17 C18 C19 C20 C21 C24 C25 C26 C27 C28 C31 C32 C33 C34 C35 C36 C37 C38 C39 C40 C41 C42 C43 C44 C45 C46 C47 C48 C49 C50 C53 C54 C55 C56 C57 C58 C59 C60 Cn1 Cn2 Cp1 Cp2: library part Cap, "Capacitor GRM18 0603", LatestRevisionDate=17-Jul-2002, LatestRevisionNote="Re-released for DXP Platform.", PackageDescription="Polarized Capacitor; 2 Leads", PackageReference=POLAR0.8, Published=8-Jun-2000, Publisher="Altium Limited", Supplier 1=Mouser
C14 C23 C29 C30 C51 C52: library part "Cap Pol2_1", "Polarized Capacitor (Axial)", LatestRevisionDate=17-Jul-2002, LatestRevisionNote="Re-released for DXP Platform.", PackageDescription="Polarized Capacitor; 2 Leads", PackageReference=POLAR0.8, Published=8-Jun-2000, Publisher="Altium Limited", Simulation ModelName=CAP, Simulation PortMap=(1:1),(2:2)
C22: library part "Cap Pol2_7", "Polarized Capacitor (Axial)", LatestRevisionDate=17-Jul-2002, LatestRevisionNote="Re-released for DXP Platform.", PackageDescription="Polarized Capacitor; 2 Leads", PackageReference=POLAR0.8, Published=8-Jun-2000, Publisher="Altium Limited", Simulation ModelName=CAP, Simulation PortMap=(1:1),(2:2)
D1: library part "D Varactor", "Variable Capacitance Diode", ComponentLink1Description="Manufacturer Link", ComponentLink1URL=http://www.zetex.com/, DatasheetVersion=Jan-1998, LatestRevisionDate=29-May-2009, LatestRevisionNote="IPC-7351 Footprint Added.", Note="Pin 2 is not connected and not drawn.", PackageDescription="3-Pin SOT-23 Package 0.95 mm Pitch, 2.3 mm Lead Span - Reverse Pinning", PackageReference=SOT23A, PackageVersion=1996, Published=8-Jun-2000, Publisher="Altium Limited"
IF IN_LNA OUT_F OUT_LNA RF T1 T2 T4 T5 VLO: library part SMB, "SMB Straight Connector", LatestRevisionDate=17-Jul-2002, LatestRevisionNote="Re-released for DXP Platform.", Publisher="Altium Limited"
IN_C IN_IF IN_PA OUT_C OUT_IF OUT_PA OUT_VCO Vtune: "SMA Straight Connector", LatestRevisionDate=17-Jul-2002, LatestRevisionNote="Re-released for DXP Platform.", Publisher="Altium Limited"
L1 L2 L3 L4 L5 L6 L7 L8 L9 L10 L11 L12 L13 L14 L17 L18: "Ind RF Chip Wirewound 18nH 5% 100MHz 40Q-Factor 550mA 0603 Paper T/R", Package=None, Availability=Unavailable, MP=LQW18AN18NJ00D, Parameter 1=LQW0603, Price=None
L15 L16: library part LQW18_1, "Inductor LQW Package: 0603 (1608)", Package="1608 Murata", Arrow_Electronics-Purchase-URL=https://snapeda.com/shop?store=Arrow+Electronics&id=1501811, Availability=Good, DigiKey-Purchase-URL=https://snapeda.com/shop?store=DigiKey&id=1501811, MF=Murata, Mouser-Purchase-URL=https://snapeda.com/shop?store=Mouser&id=1501811, MP=LQW18ANR47J00D, Price=None, SnapEDA_Link=https://www.snapeda.com/parts/LQW18ANR47J00D/Murata/view-part/1501811/?ref=snap
Q2: library part BFU550A, "NPN Bipolar Transistor", Code_JEDEC=TO-226-AA, LatestRevisionDate=17-Jul-2002, LatestRevisionNote="Re-released for DXP Platform.", PackageDescription="TO, Flat Index; 3 In-Line, Axial Leads; Body Dia. 4.8mm; Leads 0.55 x 0.51 mm (max)", PackageReference=TO-226-AA, Published=8-Jun-2000, Publisher="Altium Limited"
R1 R2 R3 R4 R5 R6 R7 R8 R9 R10 R11 R12 R13 R14 R15 R16 R17 R18 R19 R20 R21 R22 R23 R24 R25 R26 R27 R28 R29 R30 R31 R32 R33 R34 R35 R36 R37 R38 R39: "Resistor RMC0603", Mfr_Name="Stackpole International"
T3: "SMB Straight Connector", LatestRevisionDate=17-Jul-2002, LatestRevisionNote="Re-released for DXP Platform.", Publisher="Altium Limited"
U1 U4: "No Description Available", Mfr_Name=NXP, RefDes=RefDes, Type=Type
U2: "Diodo", Mfr_Name=Infineon, RefDes=RefDes, Type=Type
U3: "No Description Available", Mfr_Name=TDK, RefDes=RefDes, Type=Type
U5: "No Description Available", Manufacturer=NationalSemiconductor, Mfr_Name="Texas Instruments", PartNumber=LMP7712MM, Characteristics=LMP7712MM18VPrecisonDualLowNoiseCMOSInputOpAmpwithShutdown, ComponentLink1DescBC=LMP7712Datasheet, ComponentLink1URL=http//wwwnationalcom/ds/LM/LMP7712pdf, ComponentLink2DescA4=LMP7712WebPage, ComponentLink2URL=http//wwwnationalcom/pf/LM/LMP7712html, ComponentLink3DescAC=MUB10APackageWebPage, ComponentLink3URL=http//wwwnationalcom/packaging/folders/mub10ahtml, CompType=OpAmpIC, LatestRevisionDate=2009-03-16, LatestRevisionNote=MassUpdate, PackageDescription=10LeadMSOP, PackageReference=MUB10A_L, Published=2009-03-16, Publisher=NationalSemiconductor, RoHS=O, SymbolVersion=2008-07-09, TaMax_C=1250, TaMin_C=-400, Version=B1608
U6: "No Description Available", Mfr_Name="Texas Instruments", RefDes=RefDes, Type=Type

## Via types
v1: diameter 39.37, hole 23.62, Top Layer - RF to Bottom Layer - PWR, tented both sides, 150 vias
v2: diameter 23.62, hole 11.81, Top Layer - RF to Bottom Layer - PWR, tented both sides, 72 vias
v3: diameter 137.8, hole 137.8, Top Layer - RF to Bottom Layer - PWR, 24 vias

## Nets (pads, with @x,y where several pads share a name; then routed paths per layer and width w, separated by ;. In a path a pad name is that pad's centre, name@x,y a point inside that pad or via, vN(x,y) a via of type N, cw(c..) or ccw(c..) an arc to the next point about the centre after c; other vN are vias at no path point)
B: BFR1.4 C16.1 C17.2 R3.1 R4.2 | length 293.9
  Top Layer - RF w14.5: R4.2@551.18,-2583.66 R3.1@649.61,-2583.66 ; C16.1@651.38,-2654.36 R3.1@651.38,-2583.66 ; C16.1@663.1,-2657.51 663.1,-2659.53 664.99,-2661.42 688.98,-2661.42 ; C17.2@692.91,-2714.57 692.91,-2665.35 688.98,-2661.42 ; BFR1.4@730.32,-2661.42 688.98,-2661.42
C: BFR1.2 R2.1 | length 146.3
  Top Layer - RF w14.5: BFR1.2@803.15,-2616.14 807.09,-2612.2 R2.1@807.09,-2471.46